# Altium PCB LM7X05-PCB.PcbDoc
Units mm, origin at the board's own origin, x right, y up, seen from the top; angles counter-clockwise.
Board outline 100 x 60 mm, 2 copper layers (Top Layer, Bottom Layer); 55 components, 9 nets, 135 pads, 128 vias.
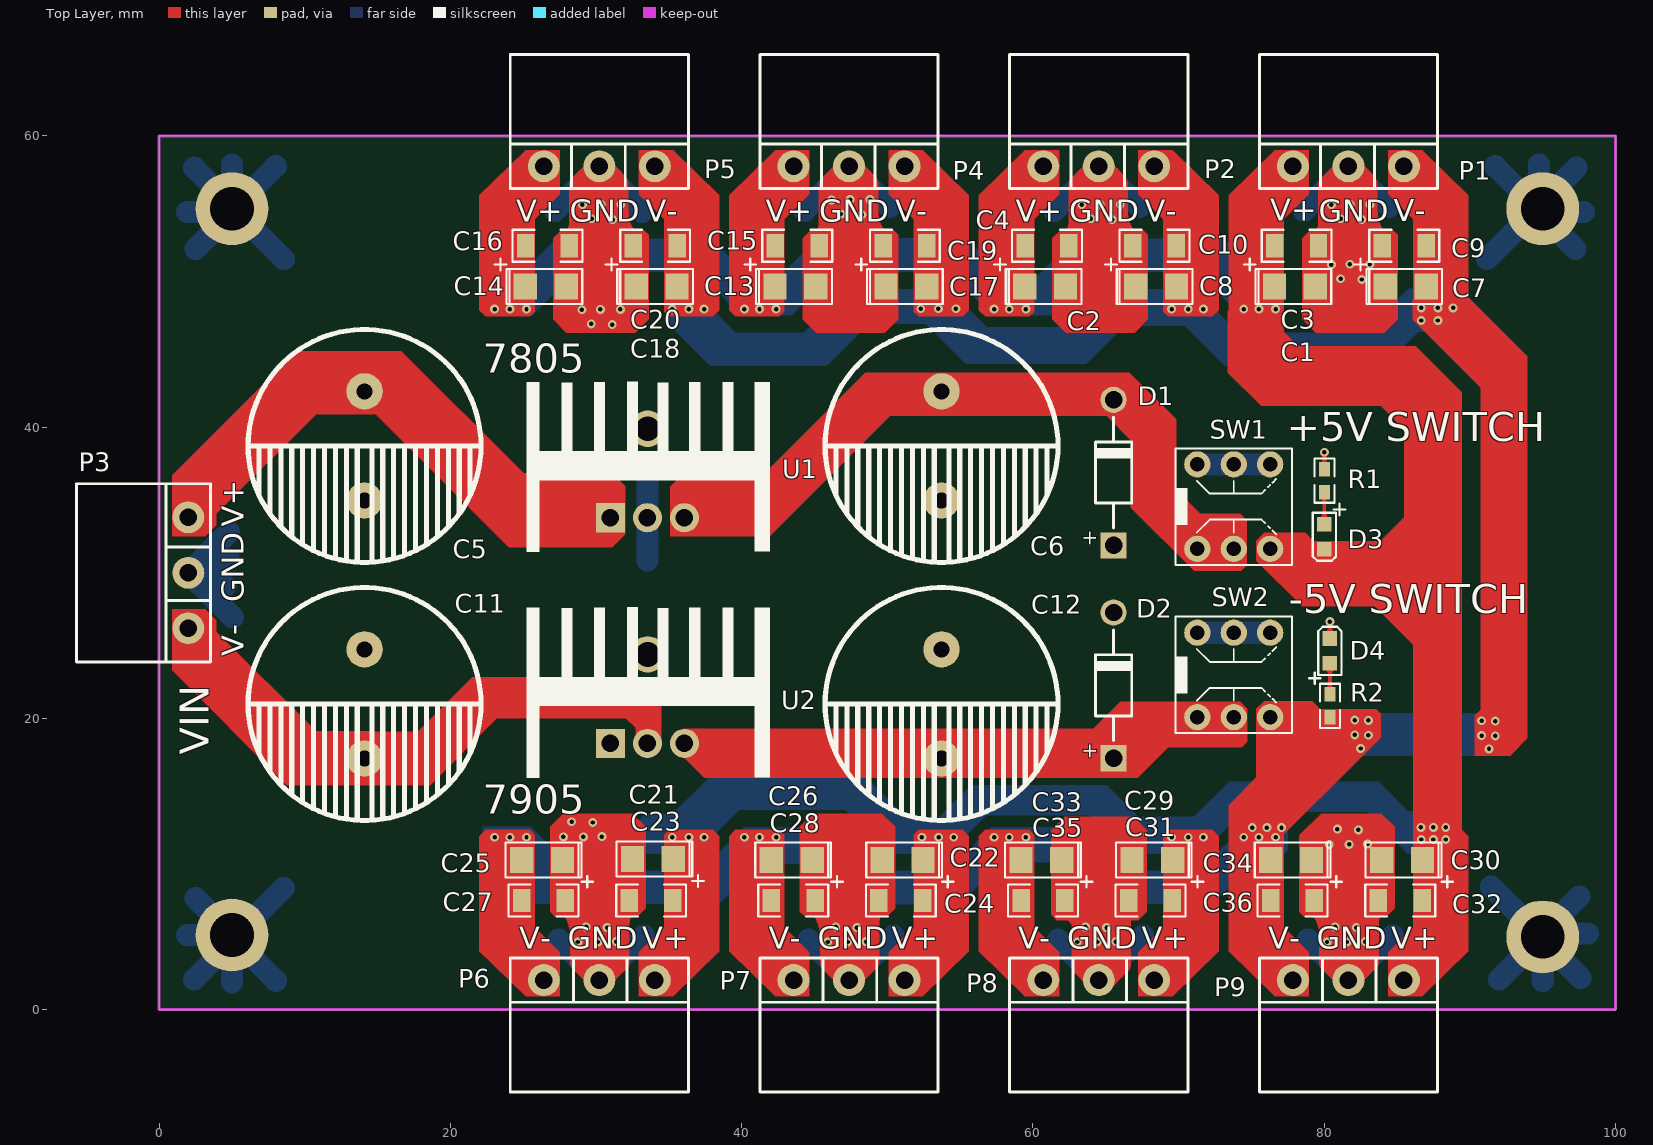
[diagram p0: Top Layer view]
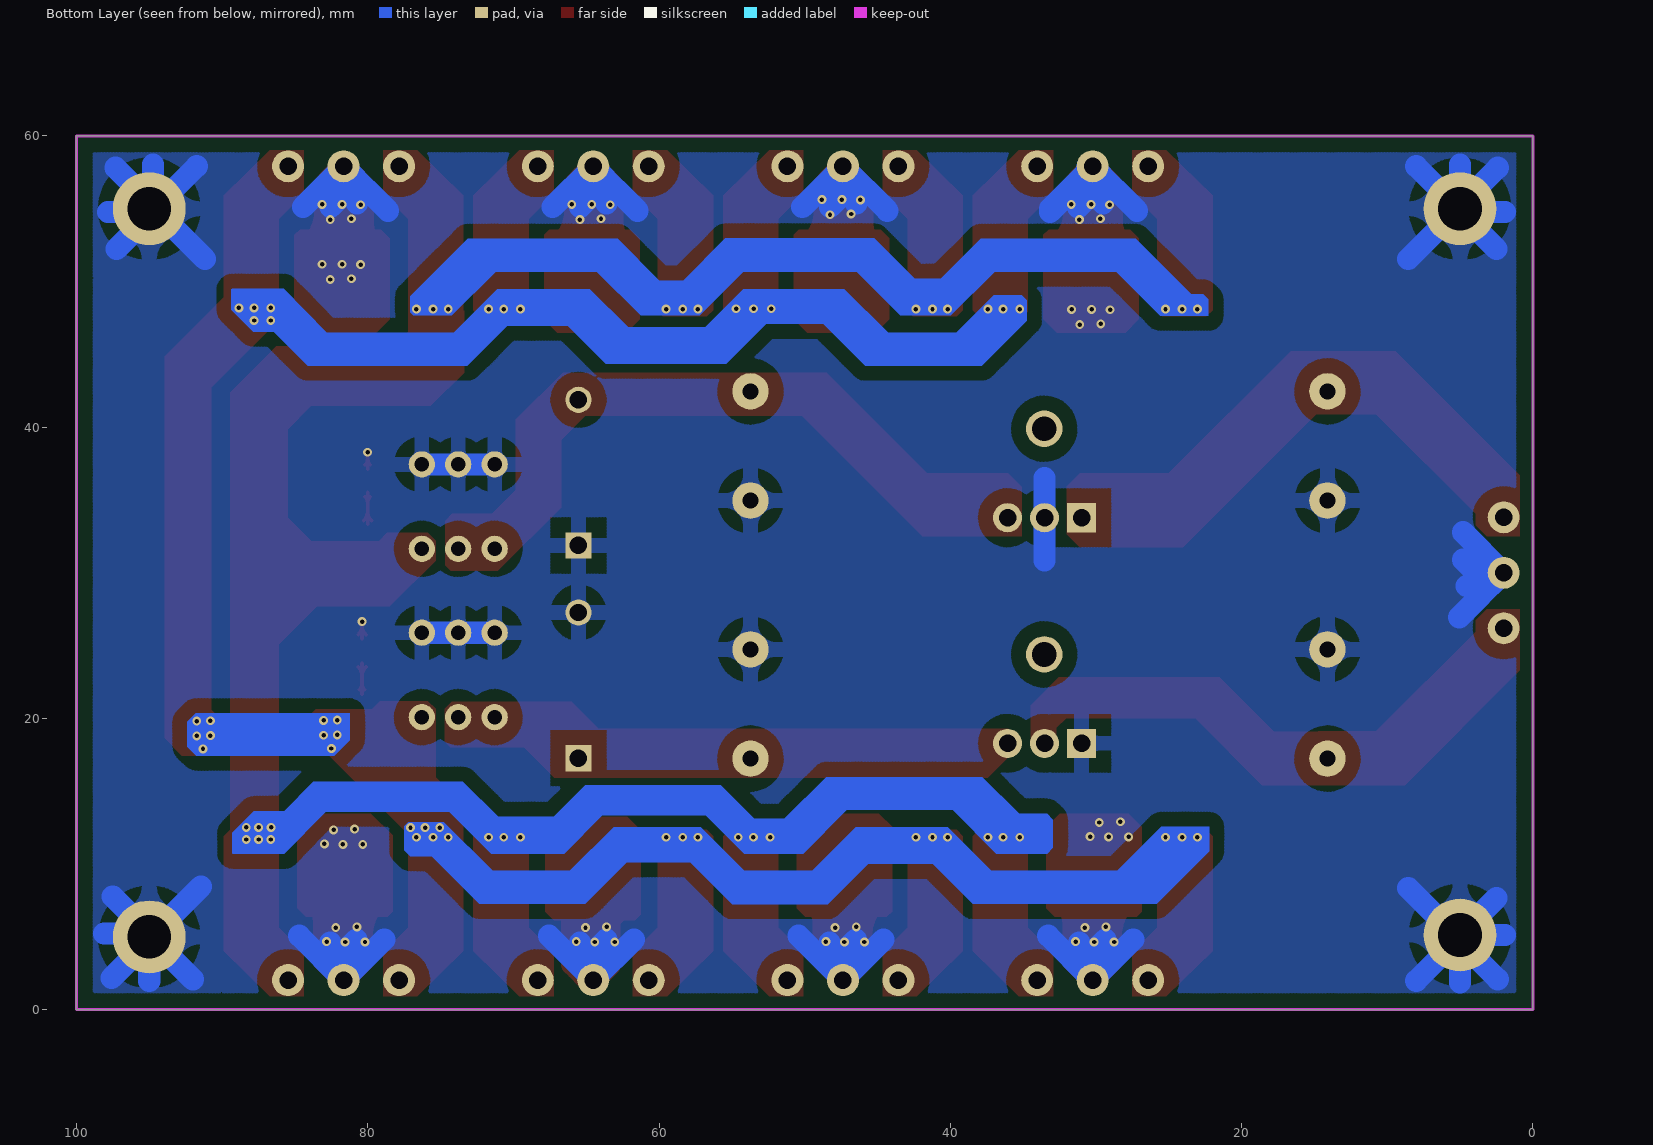
[diagram p1: Bottom Layer view, seen from below]

## Layer stack, top to bottom
Top Layer: signal copper 0.0356
Dielectric: dielectric 0.32, FR-4, Dk 4.8
Bottom Layer: signal copper 0.0356

## Board outline
0,0 100,0 100,60 0,60

## Design rules (kind name [scope] priority, off if disabled: settings)
Clearance Clearance_gnd [inpoly] p1: gap=1.016
Clearance [All] p2: gap=0.508
PolygonConnect PolygonConnect_1 [isvia] p1: connectstyle=Direct reliefconductorwidth=0.254 reliefentries=4 polygonreliefangle="90 Angle"
PolygonConnect [All] p2: connectstyle=Relief reliefconductorwidth=1.016 reliefentries=4 polygonreliefangle="90 Angle"
RoutingVias [All] p1: holewidth=0.762 width=1.27 viastyle="Through Hole" minholewidth=0.762 minwidth=1.27 maxholewidth=0.762 maxwidth=1.27
SilkscreenOverComponentPads [All] p1: minsilkscreentomaskgap=0.254
SolderMaskExpansion [All] p1: expansion=0.064
Width [All] p1: maxlimit=1.524 minlimit=0.254 preferedwidth=0.254
27 further rules are at their usual default settings.

## Classes and differential pairs
component class "Room Definition 1": C1 C3 C7 C9 P1
component class "Room Definition 2": C13 C15 C17 C19 P4
component class "Room Definition 3": C14 C16 C18 C20 P5
component class "Room Definition 4": C2 C4 C8 C10 P2
component class "Room Definition 5": C21 C23 C25 C27 P6
component class "Room Definition 6": C22 C24 C26 C28 P7
component class "Room Definition 7": C29 C31 C33 C35 P8
component class "Room Definition 8": C30 C32 C34 C36 P9

## Components (designator, comment, footprint, x,y, rotation, side; value= is the part's Value field where it differs from the comment)
C1 "10uF" 1206T 77.981,49.657 r0 top locked
C2 "10uF" 1206T 60.836,49.657 r0 top locked
C3 "0.1uF" 1206C 78.105,52.451 r180 top locked
C4 "0.1uF" 1206C 60.96,52.451 r180 top locked
C5 "2200uF/25V" C(16x31) 14.105,38.71 r270 top locked
C6 "2200uF/16V" C(16x31) 53.721,38.71 r270 top locked
C7 "10uF" 1206T 85.595,49.657 r0 top locked
C8 "10uF" 1206T 68.45,49.657 r0 top locked
C9 "0.1uF" 1206C 85.495,52.451 r180 top locked
C10 "0.1uF" 1206C 68.35,52.451 r180 top locked
C11 "2200uF/25V" C(16x31) 14.105,20.99 r270 top locked
C12 "2200uF/16V" C(16x31) 53.721,20.99 r270 top locked
C13 "10uF" 1206T 43.691,49.657 r0 top locked
C14 "10uF" 1206T 26.546,49.657 r0 top locked
C15 "0.1uF" 1206C 43.815,52.451 r180 top locked
C16 "0.1uF" 1206C 26.67,52.451 r180 top locked
C17 "10uF" 1206T 51.305,49.657 r0 top locked
C18 "10uF" 1206T 34.16,49.657 r0 top locked
C19 "0.1uF" 1206C 51.205,52.451 r180 top locked
C20 "0.1uF" 1206C 34.06,52.451 r180 top locked
C21 "10uF" 1206T 33.906,10.343 r180 top locked
C22 "10uF" 1206T 51.051,10.287 r180 top locked
C23 "0.1uF" 1206C 33.782,7.493 r0 top locked
C24 "0.1uF" 1206C 50.927,7.493 r0 top locked
C25 "10uF" 1206T 26.292,10.287 r180 top locked
C26 "10uF" 1206T 43.437,10.287 r180 top locked
C27 "0.1uF" 1206C 26.392,7.493 r0 top locked
C28 "0.1uF" 1206C 43.537,7.493 r0 top locked
C29 "10uF" 1206T 68.196,10.287 r180 top locked
C30 "10uF" 1206T 85.341,10.287 r180 top locked
C31 "0.1uF" 1206C 68.072,7.493 r0 top locked
C32 "0.1uF" 1206C 85.217,7.493 r0 top locked
C33 "10uF" 1206T 60.582,10.287 r180 top locked
C34 "10uF" 1206T 77.727,10.287 r180 top locked
C35 "0.1uF" 1206C 60.682,7.493 r0 top locked
C36 "0.1uF" 1206C 77.827,7.493 r0 top locked
D1 "1N4001" DIODE-10R0X2R5-1R2 65.532,36.877 r90 top locked
D2 "1N4001" DIODE-10R0X2R5-1R2 65.532,22.272 r90 top locked
D3 "LED" 0603D 80.01,32.473 r270 top locked
D4 "LED" 0603D 80.391,24.638 r90 top locked
P1 "Header 3" KF2EDG_3R81_3P 81.661,57.912 r0 top locked
P2 "Header 3" KF2EDG_3R81_3P 64.516,57.912 r0 top locked
P3 "Header 3" KF2EDG_3R81_3P 2,30 r90 top locked
P4 "Header 3" KF2EDG_3R81_3P 47.371,57.912 r0 top locked
P5 "Header 3" KF2EDG_3R81_3P 30.226,57.912 r0 top locked
P6 "Header 3" KF2EDG_3R81_3P 30.226,2.032 r180 top locked
P7 "Header 3" KF2EDG_3R81_3P 47.371,2.032 r180 top locked
P8 "Header 3" KF2EDG_3R81_3P 64.516,2.032 r180 top locked
P9 "Header 3" KF2EDG_3R81_3P 81.661,2.032 r180 top locked
R1 "5k1" R0603 80.01,36.322 r90 top locked
R2 "5k1" R0603 80.391,20.866 r270 top locked
SW1 "SWITCH" SW-8R5X8R5 73.787,34.544 r90 top locked
SW2 "SWITCH" SW-8R5X8R5 73.787,22.987 r90 top locked
U1 "LM7805" TO-220B 33.528,33.782 r0 top locked
U2 "LM7905" TO-220B 33.529,18.288 r0 top locked

## Footprints (in the part's own frame and the unit in brackets; to place one, negate y for a bottom-side part, rotate by r counter-clockwise, add the part's x,y. Pads: shape width x height; smd on the part's side, far side on the other; paste and mask are expansions set on the pad)
0603D [mm]
  rect 1x1 smd: 1(0.85,0) 2(-0.85,0)
  silkscreen extent -2.28,-0.8 1.65,1.44
1206C [mm]
  rect 1.2x1.6 smd: 1(-1.5,0) 2(1.5,0)
  silkscreen extent -2.4,-1.1 2.4,1.1
1206T [mm]
  rect 1.6x1.8 smd: 1(-1.4,0) 2(1.4,0)
  silkscreen extent -3.5,-1.2 2.5,1.9
C(16x31) [mm]
  round 2.5 hole 1.1: 1(-3.75,0) 2(3.75,0)
  silkscreen extent -8,-8 8,8, body extent -8,-7.99 7.99,7.99, height 31.01
DIODE-10R0X2R5-1R2 [mm]
  rect 1.8x1.8 hole 1.2: 1(-5,0)
  round 1.8 hole 1.2: 2(5,0)
  silkscreen extent -3.8,-1.25 3.8,1.25
KF2EDG_3R81_3P [mm]
  round 2.2 hole 1.2: 1(-3.81,0) 2(0,0) 3(3.81,0)
  silkscreen extent -6.11,-1.52 6.11,7.68
R0603 [mm] "Chip Resistor, 2-Leads, Body 1.6x0.8mm, IPC Medium Density"
  rect 1x0.762 smd: 1(-0.8,0) 2(0.8,0)
  silkscreen extent -1.52,-0.69 1.52,0.69, body extent -0.8,-0.4 0.8,0.4, height 0.38
SW-8R5X8R5 [mm]
  round 1.8 hole 1: 1(-2.9,2.5) 2(-2.9,0) 3(-2.9,-2.5) 4(2.9,-2.5) 5(2.9,0) 6(2.9,2.5)
  silkscreen extent -4,-4 4,4
TO-220B [mm]
  rect 2x2 hole 1.2: 1(-2.54,0)
  round 2 hole 1.2: 2(0,0) 3(2.54,0)
  round 2.5 hole 1.7: ""(0.024,6.108)
  silkscreen extent -8.31,-2.36 8.41,9.35

## Part data
C1 C2 C7 C8 C13 C14 C17 C18 C21 C22 C25 C26 C29 C30 C33 C34: library part Cap2, "CAP TANT 10UF 10V 10% 1206"
C3 C4 C9 C10 C15 C16 C19 C20 C23 C24 C27 C28 C31 C32 C35 C36: library part Cap1, "CAP CER 10000PF 100V X7R 0603"
C5 C6 C11 C12: library part Cap3, "CAP ALUM POLY 150UF 20% 10V SMD"
D1 D2: library part Diode, "Default Diode"
D3 D4: "Typical RED GaAs LED"
P1 P2 P3 P4 P5 P6 P7 P8 P9: "Header, 3-Pin"
R1 R2: library part Res1, "RES SMD 1K OHM 0.5% 1/16W 0603"
U1: library part LM78XX, "LM78XX"
U2: library part LM79XX, "LM79XX"

## Free pads (board coordinates)
  round 5 hole 3: 0(5,5.127) 0(5,55) 0(95,5) 0(95,55)

## Via types
v1: diameter 0.61, hole 0.305, Top Layer to Bottom Layer, tented both sides, 128 vias

## Nets (pads, with @x,y where several pads share a name; then routed paths per layer and width w, separated by ;. In a path a pad name is that pad's centre, name@x,y a point inside that pad or via, vN(x,y) a via of type N, cw(c..) or ccw(c..) an arc to the next point about the centre after c; other vN are vias at no path point)
+5V: C1.1 C2.1 C3.2 C4.2 C13.1 C14.1 C15.2 C16.2 C21.1 C22.1 C23.2 C24.2 C29.1 C30.1 C31.2 C32.2 D3.1 P1.1 P2.1 P4.1 P5.1 P6.1 P7.1 P8.1 P9.1 SW1.3 | length 10.5
  Top Layer w0.254: SW1.3 D3.1@79.989,31.644 ; SW1.3@76.654,31.277 cw(c77.54,30.391) 77.54,31.644 cw(c77.54,32.897) SW1.3@76.654,32.011 ; SW1.3@76.834,31.097 cw(c78.153,29.778) 78.153,31.644 cw(c78.153,33.51) SW1.3@76.834,32.191 ; 79.059,31.644 cw(c79.059,30.672) D3.1@79.746,31.359 ; 79.16,31.644 ccw(c79.16,32.473) D3.1@79.746,31.887 ; D3.1 D3.1@79.989,31.644 ; D3.1@80.391,31.623 80.37,31.644 80.01,31.644 D3.1@79.989,31.644
  other v1: 86.665,11.684 87.49,11.684 88.341,11.684 35.23,11.836 36.373,11.836 37.414,11.836 52.375,11.836 53.518,11.836 54.559,11.836 69.52,11.836 70.663,11.836 71.704,11.836 86.639,12.522 87.49,12.522 88.341,12.522 23.038,48.108 24.079,48.108 25.222,48.108 40.183,48.108 41.224,48.108 42.367,48.108 57.328,48.108 58.369,48.108 59.512,48.108 74.473,48.108 75.514,48.108 76.657,48.108
+5V_IN: C6.1 D1.2 SW1.1 SW1.2 U1.3 | length 103.8
  Top Layer w0.254: U1.3 41.351,33.782 50.029,42.46 C6.1 64.949,42.46 D1.2 68.555,38.854 68.555,34.376 SW1.1 SW1.2 ; U1.3@36.506,33.344 cw(c37.562,32.288) 37.562,33.782 cw(c37.562,35.276) U1.3@36.506,34.22 ; U1.3@36.685,33.165 cw(c38.176,31.674) 38.176,33.782 cw(c38.176,35.89) U1.3@36.685,34.399 ; C6.1@52.927,41.666 ccw(c51.01,39.748) 51.01,42.46 ccw(c51.01,45.171) C6.1@52.927,43.254 ; C6.1@53.107,41.845 ccw(c51.623,40.362) 51.623,42.46 ccw(c51.623,44.558) C6.1@53.107,43.074 ; C6.1@53.286,42.025 ccw(c52.236,40.975) 52.236,42.46 ccw(c52.236,43.944) C6.1@53.286,42.894 ; C6.1@54.156,42.025 cw(c55.206,40.975) 55.206,42.46 cw(c55.206,43.944) C6.1@54.156,42.894 ; C6.1@54.335,41.845 cw(c55.819,40.362) 55.819,42.46 cw(c55.819,44.558) C6.1@54.335,43.074 ; C6.1@54.515,41.666 cw(c56.432,39.748) 56.432,42.46 cw(c56.432,45.171) C6.1@54.515,43.254 ; 62.259,42.46 cw(c62.259,38.604) D1.2@64.985,41.33 ; 62.873,42.46 cw(c62.873,39.218) D1.2@65.165,41.51 ; 63.486,42.46 cw(c63.486,39.831) D1.2@65.345,41.69 ; 64.099,42.46 cw(c64.099,40.444) D1.2@65.524,41.869 ; 64.712,42.46 cw(c64.712,41.057) D1.2@65.704,42.049 ; D1.2@65.532,41.104 cw(c65.532,39.238) 66.852,40.557 cw(c68.171,41.877) D1.2@66.305,41.877 ; D1.2@65.532,41.358 cw(c65.532,40.105) 66.418,40.991 cw(c67.304,41.877) D1.2@66.051,41.877 ; SW1.1@70.514,31.644 ccw(c68.648,31.644) 69.967,32.964 ccw(c71.287,34.283) SW1.1@71.287,32.417 ; SW1.1@70.768,31.644 ccw(c69.515,31.644) 70.401,32.53 ccw(c71.287,33.416) SW1.1@71.287,32.163 ; SW1.1@71.654,31.277 cw(c72.54,30.391) 72.54,31.644 cw(c72.54,32.897) SW1.1@71.654,32.011 ; SW1.1@71.834,31.097 cw(c73.153,29.778) 73.153,31.644 cw(c73.153,33.51) SW1.1@71.834,32.191 ; SW1.2@73.24,31.097 ccw(c71.921,29.778) 71.921,31.644 ccw(c71.921,33.51) SW1.2@73.24,32.191 ; SW1.2@73.42,31.277 ccw(c72.534,30.391) 72.534,31.644 ccw(c72.534,32.897) SW1.2@73.42,32.011
+12V: C5.1 P3.3 U1.1
-5V: C7.2 C8.2 C9.1 C10.1 C17.2 C18.2 C19.1 C20.1 C25.2 C26.2 C27.1 C28.1 C33.2 C34.2 C35.1 C36.1 P1.3 P2.3 P4.3 P5.3 P6.3 P7.3 P8.3 P9.3 R2.2 SW2.3 | length 10
  Top Layer w0.254: SW2.3 80.37,20.087 R2.2 ; SW2.3@76.654,19.72 cw(c77.54,18.834) 77.54,20.087 cw(c77.54,21.34) SW2.3@76.654,20.454 ; SW2.3@76.834,19.54 cw(c78.153,18.221) 78.153,20.087 cw(c78.153,21.953) SW2.3@76.834,20.634 ; 79.727,20.087 cw(c79.727,19.402) R2.2@80.211,19.886 ; 79.828,20.087 ccw(c79.828,20.629) R2.2@80.211,20.246
  other v1: 23.038,11.836 24.079,11.836 25.222,11.836 40.183,11.836 41.224,11.836 42.367,11.836 57.328,11.836 58.369,11.836 59.512,11.836 74.473,11.836 75.514,11.836 76.657,11.836 75.057,12.497 76.06,12.497 77.064,12.497 91.313,17.907 82.499,17.932 91.745,18.796 90.805,18.821 83.033,18.847 82.093,18.872 91.745,19.812 90.805,19.837 83.033,19.863 82.093,19.888 86.665,47.32 87.808,47.32 35.23,48.108 36.373,48.108 37.414,48.108 69.52,48.108 70.663,48.108 71.704,48.108 52.299,48.133 53.505,48.133 54.712,48.133 86.665,48.184 87.808,48.184 88.849,48.184
-5V_IN: C12.2 D2.1 SW2.1 SW2.2 U2.3 | length 77
  Top Layer w0.254: U2.3 45.771,18.288 46.819,17.24 C12.2 65.5,17.24 D2.1 68.347,20.087 SW2.1 ; U2.3@36.506,17.85 cw(c37.563,16.793) 37.563,18.288 cw(c37.563,19.782) U2.3@36.506,18.726 ; U2.3@36.686,17.67 cw(c38.176,16.18) 38.176,18.288 cw(c38.176,20.395) U2.3@36.686,18.905 ; C12.2@52.927,16.446 ccw(c51.01,14.528) 51.01,17.24 ccw(c51.01,19.951) C12.2@52.927,18.034 ; C12.2@53.107,16.625 ccw(c51.623,15.142) 51.623,17.24 ccw(c51.623,19.338) C12.2@53.107,17.854 ; C12.2@53.286,16.805 ccw(c52.236,15.755) 52.236,17.24 ccw(c52.236,18.724) C12.2@53.286,17.674 ; C12.2@54.156,16.805 cw(c55.206,15.755) 55.206,17.24 cw(c55.206,18.724) C12.2@54.156,17.674 ; C12.2@54.335,16.625 cw(c55.819,15.142) 55.819,17.24 cw(c55.819,19.338) C12.2@54.335,17.854 ; C12.2@54.515,16.446 cw(c56.432,14.528) 56.432,17.24 cw(c56.432,19.951) C12.2@54.515,18.034 ; 63.588,17.24 ccw(c63.588,19.216) D2.1@64.985,17.819 ; 63.744,17.24 cw(c63.744,15.484) D2.1@64.985,16.725 ; 64.201,17.24 ccw(c64.201,18.603) D2.1@65.165,17.639 ; 64.357,17.24 cw(c64.357,16.097) D2.1@65.165,16.905 ; D2.1@65.532,17.791 ccw(c65.532,19.044) 66.418,18.158 ccw(c67.304,17.272) D2.1@66.051,17.272 ; D2.1@65.532,18.045 ccw(c65.532,19.911) 66.852,18.592 ccw(c68.171,17.272) D2.1@66.305,17.272 ; SW2.1@70.74,19.54 ccw(c69.421,18.221) 69.421,20.087 ccw(c69.421,21.953) SW2.1@70.74,20.634 ; SW2.1@70.92,19.72 ccw(c70.034,18.834) 70.034,20.087 ccw(c70.034,21.34) SW2.1@70.92,20.454
-12V: C11.2 P3.1 U2.2 | length 39.8
  Top Layer w0.254: C11.2 17.976,17.24 22.682,21.946 32.156,21.946 33.529,20.573 U2.2 ; C11.2@14.54,16.805 cw(c15.59,15.755) 15.59,17.24 cw(c15.59,18.724) C11.2@14.54,17.674 ; C11.2@14.719,16.625 cw(c16.203,15.142) 16.203,17.24 cw(c16.203,19.338) C11.2@14.719,17.854 ; C11.2@14.899,16.446 cw(c16.816,14.528) 16.816,17.24 cw(c16.816,19.951) C11.2@14.899,18.034 ; U2.2@32.911,18.905 ccw(c31.421,20.396) 33.529,20.396 ccw(c35.636,20.396) U2.2@34.146,18.905 ; U2.2@33.091,18.726 ccw(c32.034,19.782) 33.529,19.782 ccw(c35.023,19.782) U2.2@33.966,18.726
GND: C1.2 C2.2 C3.1 C4.1 C5.2 C6.2 C7.1 C8.1 C9.2 C10.2 C11.1 C12.1 C13.2 C14.2 C15.1 C16.1 C17.1 C18.1 C19.2 C20.2 C21.2 C22.2 C23.1 C24.1 C25.1 C26.1 C27.2 C28.2 C29.2 C30.2 C31.1 C32.1 C33.1 C34.1 C35.2 C36.2 D1.1 D2.2 D4.1 P1.2 P2.2 P3.2 P4.2 P5.2 P6.2 P7.2 P8.2 P9.2 pad.0 R1.2 SW1.4 SW1.5 SW1.6 SW2.4 SW2.5 SW2.6 U1.2 U2.1 | length 478.2
  Top Layer w0.254: R1.2@79.83,37.421 ccw(c79.397,37.854) 80.01,37.854 ; v1@79.884,38.153 cw(c79.581,37.849) 80.01,37.849 cw(c80.439,37.849) v1@80.136,38.153 ; R1.2 v1(80.01,38.279) ; 80.01,37.854 ccw(c80.623,37.854) R1.2@80.19,37.421 ; D4.1@80.127,25.752 ccw(c79.491,26.388) 80.391,26.388 ccw(c81.291,26.388) D4.1@80.655,25.752 ; v1@80.265,26.519 cw(c79.962,26.215) 80.391,26.215 cw(c80.82,26.215) v1@80.517,26.519 ; D4.1 v1(80.391,26.645)
  Top Layer w1.524: C27.2 28.981,6.404 28.981,3.277 P6.2 ; C27.2@27.956,7.442 cw(c27.289,5.887) 28.981,5.887 ; C27.2@28.007,7.408 cw(c25.653,5.054) 28.981,5.054 ; C16.1@28.285,52.536 ccw(c26.786,54.035) 28.905,54.035 ; 28.905,52.629 28.905,56.591 P5.2 ; 28.981,5.853 ccw(c34.047,5.853) P6.2@30.465,2.271 ; P5.2@29.987,57.673 cw(c26.405,54.091) 31.471,54.091 ; P5.2@30.19,57.576 cw(c30.039,56.152) 31.471,56.152 ; 30.226,7.01 P6.2 ; 30.226,52.934 P5.2 ; 31.471,54.89 ccw(c34.799,54.89) C20.2@32.445,52.536 ; 31.547,5.909 cw(c33.666,5.909) C23.1@32.167,7.408 ; 31.547,6.557 cw(c32.467,6.557) C23.1@32.242,7.45 ; 31.547,7.315 31.547,3.353 P6.2 ; C20.2 31.471,53.54 31.471,56.667 P5.2 ; C28.2 46.126,6.404 46.126,3.277 P7.2 ; C28.2@45.101,7.442 cw(c44.434,5.887) 46.126,5.887 ; C28.2@45.152,7.408 cw(c42.798,5.054) 46.126,5.054 ; C15.1@45.43,52.536 ccw(c43.931,54.035) 46.05,54.035 ; 46.05,52.629 46.05,56.591 P4.2 ; 46.126,5.853 ccw(c51.192,5.853) P7.2@47.61,2.271 ; P4.2@47.132,57.673 cw(c43.55,54.091) 48.616,54.091 ; P4.2@47.335,57.576 cw(c47.184,56.152) 48.616,56.152 ; 47.371,7.01 P7.2 ; 47.371,52.934 P4.2 ; 48.616,54.89 ccw(c51.944,54.89) C19.2@49.59,52.536 ; 48.692,5.909 cw(c50.811,5.909) C24.1@49.312,7.408 ; 48.692,6.557 cw(c49.612,6.557) C24.1@49.387,7.45 ; 48.692,7.315 48.692,3.353 P7.2 ; C19.2 48.616,53.54 48.616,56.667 P4.2 ; C35.2@62.309,7.264 63.398,6.175 63.398,3.048 P8.2@64.643,1.803 ; C4.1@62.575,52.536 ccw(c61.076,54.035) 63.195,54.035 ; 63.195,52.629 63.195,56.591 P2.2 ; v1@63.398,5.546 ccw(c68.03,5.546) P8.2@64.755,2.271 ; P8.2@64.277,2.271 ccw(c63.393,3.155) 64.643,3.155 ; P2.2@64.277,57.673 cw(c60.695,54.091) 65.761,54.091 ; P2.2@64.48,57.576 cw(c64.329,56.152) 65.761,56.152 ; P8.2@64.516,2.37 ccw(c64.516,4.045) 65.7,2.86 ; 64.516,52.934 P2.2 ; 64.643,6.782 P8.2@64.643,1.803 ; 65.761,54.89 ccw(c69.089,54.89) C10.2@66.735,52.536 ; 65.964,6.216 cw(c67.649,6.216) C31.1@66.457,7.408 ; 65.964,6.651 cw(c66.811,6.651) C31.1@66.515,7.445 ; 65.964,7.087 65.964,3.124 P8.2@64.643,1.803 ; C10.2 65.761,53.54 65.761,56.667 P2.2 ; C36.2 80.416,6.404 80.416,3.277 P9.2 ; C36.2@79.391,7.442 cw(c78.724,5.887) 80.416,5.887 ; C36.2@79.442,7.408 cw(c77.088,5.054) 80.416,5.054 ; C3.1@79.72,52.536 ccw(c78.221,54.035) 80.34,54.035 ; 80.34,52.629 80.34,56.591 P1.2 ; 80.416,5.853 ccw(c85.482,5.853) P9.2@81.9,2.271 ; P1.2@81.422,57.673 cw(c77.84,54.091) 82.906,54.091 ; P1.2@81.625,57.576 cw(c81.474,56.152) 82.906,56.152 ; 81.661,7.01 P9.2 ; 81.661,52.934 P1.2 ; 82.906,54.89 ccw(c86.234,54.89) C9.2@83.88,52.536 ; 82.982,5.909 cw(c85.101,5.909) C32.1@83.602,7.408 ; 82.982,6.557 cw(c83.902,6.557) C32.1@83.677,7.45 ; 82.982,7.315 82.982,3.353 P9.2 ; C9.2 82.906,53.54 82.906,56.667 P1.2
  Bottom Layer w0.254: 28.473,55.728 28.473,56.693
  Bottom Layer w1.524: 1.905,5.131 1.909,5.127 pad.0@5,5.127 ; 1.905,54.771 1.909,54.775 pad.0@5,54.775 ; 2.413,2.088 5,4.675 pad.0@5,5.127 ; 2.413,57.814 5,55.227 pad.0@5,54.775 ; 2.487,7.676 5,5.163 pad.0@5,5.127 ; 2.487,52.226 5,54.739 pad.0@5,54.775 ; 4.565,29.086 2.914,29.086 P3.2 ; 4.789,30.889 3.9,30 P3.2 ; 4.789,32.789 P3.2 ; 5,1.876 pad.0@5,5.127 ; pad.0@5,4.441 pad.0@5,5.127 ; pad.0@5,55.461 pad.0@5,54.775 ; 5,58.026 pad.0@5,54.775 ; 5.048,26.952 P3.2 ; 8.001,1.986 5,4.987 pad.0@5,5.127 ; 8.001,57.916 5,54.915 pad.0@5,54.775 ; 8.56,8.357 5.33,5.127 pad.0@5,5.127 ; 8.56,51.546 5.33,54.775 pad.0@5,54.775 ; 27.178,54.864 P5.2 ; 27.437,4.821 P6.2 ; 29.337,4.821 30.226,3.932 P6.2 ; 29.515,55.379 cw(c32.759,55.379) P5.2@30.465,57.673 ; 29.515,55.428 29.515,57.201 P5.2 ; P5.2@30.564,57.912 ccw(c31.932,57.912) 30.965,56.945 ; v1@31.14,4.597 31.14,2.946 P6.2 ; 31.217,55.093 30.226,56.083 P5.2 ; 33.274,5.08 P6.2 ; 33.528,30.841 U1.2 33.528,36.505 ; 44.323,54.864 P4.2 ; 44.582,4.821 P7.2 ; 46.457,55.347 46.457,56.998 P4.2 ; 46.482,4.821 47.371,3.932 P7.2 ; 48.26,55.123 47.371,56.012 P4.2 ; v1@48.285,4.597 48.285,2.946 P7.2 ; 50.16,55.123 P4.2 ; 50.419,5.08 P7.2 ; 61.468,54.864 P2.2 ; 61.727,4.821 P8.2 ; v1@63.602,55.347 63.602,56.998 P2.2 ; 63.627,4.821 64.516,3.932 P8.2 ; 65.405,55.123 64.516,56.012 P2.2 ; v1@65.43,4.597 65.43,2.946 P8.2 ; 67.305,55.123 P2.2 ; 67.564,5.08 P8.2 ; SW2.6 SW2.4 ; SW1.6 SW1.4 ; 78.613,54.864 P1.2 ; 78.872,4.821 P9.2 ; v1@80.747,55.347 80.747,56.998 P1.2 ; 80.772,4.821 81.661,3.932 P9.2 ; 82.55,55.123 81.661,56.012 P1.2 ; v1@82.575,4.597 82.575,2.946 P9.2 ; 84.45,55.123 P1.2 ; 84.709,5.08 P9.2 ; 91.182,51.546 94.412,54.775 pad.0@94.742,54.775 ; 91.44,8.454 94.67,5.225 pad.0@95,5.225 ; 91.741,57.916 94.742,54.915 pad.0@94.742,54.775 ; 91.999,2.084 95,5.085 pad.0@95,5.225 ; pad.0@94.742,55.461 pad.0@94.742,54.775 ; 94.742,58.026 pad.0@94.742,54.775 ; 95,1.974 pad.0@95,5.225 ; pad.0@95,4.539 pad.0@95,5.225 ; 97.255,52.226 94.742,54.739 pad.0@94.742,54.775 ; 97.329,57.814 94.742,55.227 pad.0@94.742,54.775 ; 97.513,7.774 95,5.261 pad.0@95,5.225 ; 97.587,2.186 95,4.773 pad.0@95,5.225 ; 97.833,54.775 pad.0@94.742,54.775 ; 98.095,5.229 98.091,5.225 pad.0@95,5.225 ; P5.2 30.226,57.683 33.147,54.762 33.147,54.991 P5.2
  other v1: 28.753,4.648 30.124,4.648 45.898,4.648 47.269,4.648 63.043,4.648 64.414,4.648 80.188,4.648 81.559,4.648 31.394,4.674 48.539,4.674 65.684,4.674 82.829,4.674 30.759,5.639 47.904,5.639 65.049,5.639 82.194,5.639 29.312,5.69 46.457,5.69 63.602,5.69 80.747,5.69 80.34,11.354 81.712,11.354 82.982,11.379 27.762,11.862 29.134,11.862 30.404,11.887 82.347,12.344 80.899,12.395 29.769,12.852 28.321,12.903 31.115,47.041 29.667,47.092 29.032,48.057 30.302,48.082 31.674,48.082 82.575,50.14 81.128,50.19 80.493,51.156 81.763,51.181 83.134,51.181 31.14,54.254 65.43,54.254 82.575,54.254 29.693,54.305 63.983,54.305 81.128,54.305 48.26,54.585 46.812,54.635 29.058,55.27 63.348,55.27 80.493,55.27 30.328,55.296 31.699,55.296 64.618,55.296 65.989,55.296 81.763,55.296 83.134,55.296 46.177,55.601 47.447,55.626 48.819,55.626
NetD3_2: D3.2 R1.1 | length 4.6
  Top Layer w0.254: D3.2@79.746,33.587 ccw(c79.11,34.224) 80.01,34.224 ccw(c80.91,34.224) D3.2@80.274,33.587 ; R1.1@79.83,35.223 cw(c79.397,34.79) 80.01,34.79 cw(c80.623,34.79) R1.1@80.19,35.223 ; D3.2 R1.1
NetD4_2: D4.2 R2.1 | length 4.5
  Top Layer w0.254: D4.2@80.127,23.524 cw(c79.491,22.888) 80.391,22.888 cw(c81.291,22.888) D4.2@80.655,23.524 ; R2.1@80.211,21.965 ccw(c79.778,22.398) 80.391,22.398 ccw(c81.004,22.398) R2.1@80.571,21.965 ; R2.1 D4.2
pads on no net: U1. U2.

## Polygon pours and split planes (outlines as drawn)
GND on Bottom Layer "gnd" (hatched 90Degree grid 0.102 track 0.127, remove dead copper, pour order 1000): 0,0 100,0 100,60 0,60

## Keep-outs
Keep-Out Layer:
  the board outline again, w0.2

## Other copper
Top Layer:
  region net +12V: 0.889,36.703 9.398,45.212 14.859,45.212 15.367,44.704 15.367,41.402 14.859,40.894 10.795,40.894 3.937,34.036 3.937,33.274 3.175,32.512 0.889,32.512
  region net -12V: 0.889,23.297 8.763,15.423 14.605,15.423 15.367,16.185 15.367,18.471 14.732,19.106 10.795,19.106 3.937,25.964 3.937,26.726 3.175,27.488 0.889,27.488
  region net +12V: 14.859,40.894 24.003,31.75 31.115,31.75 32.004,32.639 32.004,35.941 31.115,36.83 25.019,36.83 16.637,45.212 14.859,45.212
  region net -12V: 14.224,19.101 17.785,19.106 21.514,22.835 32.563,22.835 34.493,20.904 34.493,18.186 34.061,17.755 33.02,17.755 32.715,18.059 32.715,19.355 32.055,20.015 23.19,20.015 18.598,15.423 14.605,15.423 14.224,15.804
  region net -5V_IN: 36.017,19.304 64.135,19.304 65.989,21.158 71.882,21.158 72.415,20.625 72.415,18.72 71.73,18.034 69.291,18.034 67.183,15.926 37.44,15.926 36.017,17.348
  region net -5V_IN: 71.882,21.158 74.219,21.158 74.701,20.676 74.701,18.39 74.346,18.034 71.73,18.034 71.287,18.477 71.287,20.087
  region net +5V_IN: 35.103,35.916 36.017,36.83 41.58,36.83 48.489,43.739 66.624,43.739 69.825,40.538 69.825,35.712 71.501,34.036 74.219,34.036 74.676,33.579 74.676,30.505 74.295,30.124 71.069,30.124 66.726,34.468 66.726,39.116 65.049,40.792 50.216,40.792 41.935,32.512 35.103,32.512
  region net -5V: 27.508,0.94 27.508,3.937 25.781,5.664 25.781,12.014 25.451,12.344 22.428,12.344 21.996,11.913 21.996,4.024 25.157,0.94
  region net -5V: 44.653,0.94 44.653,3.937 42.926,5.664 42.926,12.014 42.596,12.344 39.573,12.344 39.141,11.913 39.141,4.024 42.302,0.94
  region net -5V: 61.798,0.94 61.798,3.937 60.071,5.664 60.071,12.014 59.741,12.344 56.718,12.344 56.286,11.913 56.286,4.024 59.447,0.94
  region net -5V: 78.943,0.94 78.943,3.937 77.216,5.664 77.216,12.014 76.886,12.344 73.863,12.344 73.431,11.913 73.431,4.024 76.592,0.94
  region net +5V: 78.943,59.004 78.943,56.007 77.216,54.28 77.216,47.93 76.886,47.6 73.863,47.6 73.431,48.031 73.431,55.92 76.592,59.004
  region net +5V: 61.798,59.004 61.798,56.007 60.071,54.28 60.071,47.93 59.741,47.6 56.718,47.6 56.286,48.031 56.286,55.92 59.447,59.004
  region net +5V: 44.653,59.004 44.653,56.007 42.926,54.28 42.926,47.93 42.596,47.6 39.573,47.6 39.141,48.031 39.141,55.92 42.302,59.004
  region net +5V: 27.508,59.004 27.508,56.007 25.781,54.28 25.781,47.93 25.451,47.6 22.428,47.6 21.996,48.031 21.996,55.92 25.157,59.004
  region net -5V: 32.944,59.004 32.944,56.007 34.671,54.28 34.671,47.93 35.001,47.6 38.024,47.6 38.456,48.031 38.456,55.92 35.295,59.004
  region net -5V: 67.234,59.004 67.234,56.007 68.961,54.28 68.961,47.93 69.291,47.6 72.314,47.6 72.746,48.031 72.746,55.92 69.585,59.004
  region net -5V: 84.379,59.004 84.379,56.007 86.106,54.28 86.106,47.93 86.436,47.6 89.459,47.6 89.891,48.031 89.891,55.92 86.73,59.004
  region net +5V: 84.379,0.94 84.379,3.937 86.106,5.664 86.106,12.014 86.436,12.344 89.459,12.344 89.891,11.913 89.891,4.024 86.73,0.94
  region net +5V: 67.234,0.94 67.234,3.937 68.961,5.664 68.961,12.014 69.291,12.344 72.314,12.344 72.746,11.913 72.746,4.024 69.585,0.94
  region net +5V: 50.089,0.94 50.089,3.937 51.816,5.664 51.816,12.014 52.146,12.344 55.169,12.344 55.601,11.913 55.601,4.024 52.44,0.94
  region net +5V: 32.944,0.94 32.944,3.937 34.671,5.664 34.671,12.014 35.001,12.344 38.024,12.344 38.456,11.913 38.456,4.024 35.295,0.94
  region net -5V: 75.336,20.65 75.87,21.184 79.172,21.184 79.731,20.625 83.566,20.625 83.871,20.32 83.871,18.669 81.331,16.129 76.098,16.129 75.336,16.891
  region net +5V: 75.336,32.207 75.87,32.741 78.689,32.741 79.248,32.182 83.566,32.182 83.871,31.877 83.871,27.686 78.486,27.686 75.336,30.836
  region net -5V: 50.089,59.004 50.089,56.007 51.816,54.28 51.816,47.93 52.146,47.6 55.169,47.6 55.601,48.031 55.601,55.92 52.44,59.004
  region net -5V: 73.431,14.046 75.336,15.951 75.336,17.094 82.296,17.094 77.064,11.862 73.431,11.862
  region net +5V: 86.106,12.014 86.106,25.044 83.464,27.686 83.464,32.08 83.566,32.182 86.335,32.182 89.459,29.058 89.433,12.04
  region net +5V: 83.718,32.029 85.496,33.807 85.496,39.827 83.871,41.453 75.667,41.453 73.381,43.739 73.381,47.981 73.431,48.031 73.431,48.819 73.914,49.301 76.429,49.301 77.216,48.514 77.216,46.533 78.181,45.568 86.284,45.568 89.459,42.393 89.459,28.626 84.353,28.626 83.744,29.235
  region net -5V: 90.322,17.45 90.322,20.168 90.754,20.599 90.754,42.697 86.081,47.371 86.081,48.819 89.789,48.819 89.891,48.92 93.955,44.856 93.955,18.644 92.761,17.45
  region net GND: 26.848,6.731 26.848,12.548 27.762,13.462 32.487,13.462 33.401,12.548 33.401,6.96 32.817,6.375 27.203,6.375
  region net GND: 43.993,6.731 43.993,12.548 44.907,13.462 49.632,13.462 50.546,12.548 50.546,6.96 49.962,6.375 44.348,6.375
  region net GND: 61.265,6.502 61.265,12.319 62.179,13.233 66.904,13.233 67.818,12.319 67.818,6.731 67.234,6.147 61.62,6.147
  region net GND: 78.283,6.731 78.283,11.963 79.781,13.462 83.922,13.462 84.836,12.548 84.836,6.96 84.252,6.375 78.638,6.375
  region net GND: 85.039,53.213 85.039,47.396 84.125,46.482 79.4,46.482 78.486,47.396 78.486,52.984 79.07,53.569 84.684,53.569
  region net GND: 67.894,53.213 67.894,47.396 66.98,46.482 62.255,46.482 61.341,47.396 61.341,52.984 61.925,53.569 67.539,53.569
  region net GND: 50.749,53.213 50.749,47.396 49.835,46.482 45.11,46.482 44.196,47.396 44.196,52.984 44.78,53.569 50.394,53.569
  region net GND: 33.604,53.213 33.604,47.396 32.69,46.482 27.965,46.482 27.051,47.396 27.051,52.984 27.635,53.569 33.249,53.569
Bottom Layer:
  region net -5V: 22.225,12.548 25.527,12.548 28.55,9.525 37.186,9.525 40.183,12.522 46.482,12.522 49.479,9.525 54.153,9.525 57.15,12.522 63.119,12.522 66.116,9.525 71.425,9.525 74.778,12.878 77.216,12.878 77.495,12.598 77.495,10.947 77.089,10.541 75.616,10.541 72.339,7.264 65.075,7.264 62.205,10.135 57.861,10.135 54.966,7.239 48.412,7.239 45.644,10.008 41.199,10.008 38.456,7.264 25.832,7.264 22.225,10.871
  region net +5V: 89.306,10.744 85.725,10.693 82.884,13.589 74.403,13.589 71.532,10.719 66.523,10.719 63.906,13.335 56.775,13.335 54.159,10.719 50.095,10.719 47.098,13.716 39.827,13.716 36.83,10.719 33.356,10.719 32.95,11.125 32.95,13.056 33.356,13.462 35.281,13.462 37.795,15.977 48.52,15.977 51.39,13.106 53.448,13.106 55.759,15.418 65.049,15.418 67.234,13.233 71.05,13.233 73.463,15.646 83.744,15.646 85.75,13.64 87.814,13.64 89.306,12.147
  region net +5V: 85.725,10.693 89.256,10.693 89.306,10.744 89.306,11.1 89.103,11.303 86.03,11.303 85.725,10.998
  region net -5V: 85.775,49.504 89.306,49.504 89.357,49.454 89.357,49.098 89.153,48.895 86.08,48.895 85.775,49.2
  region net -5V: 89.357,49.454 85.775,49.504 82.809,46.482 74.092,46.482 71.095,49.479 64.744,49.479 62.128,46.863 56.825,46.863 54.209,49.479 47.269,49.479 44.272,46.482 39.599,46.482 37.008,49.073 35.103,49.073 34.747,48.717 34.747,47.319 37.845,44.221 45.847,44.221 48.717,47.091 52.654,47.091 55.397,44.348 63.652,44.348 66.268,46.964 70.409,46.964 73.152,44.221 84.13,44.221 86.467,46.558 87.864,46.558 89.357,48.051
  region net +5V: 22.275,47.65 25.577,47.65 28.6,50.673 36.957,50.673 39.954,47.676 43.433,47.676 46.431,50.673 54.203,50.673 57.2,47.676 61.264,47.676 64.261,50.673 71.221,50.673 74.218,47.676 76.886,47.676 77.089,47.879 77.089,48.971 73.127,52.933 62.839,52.933 59.969,50.063 58.344,50.063 55.448,52.959 45.211,52.959 42.443,50.19 40.64,50.19 37.897,52.933 27.279,52.933 23.469,49.124 22.631,49.124 22.275,48.767
  region net -5V: 81.229,20.345 91.821,20.345 92.38,19.787 92.38,18.059 91.77,17.45 82.296,17.45 81.229,18.517

## Silkscreen, mask and mechanical layers (free items; w line width, h text height)
Top Overlay:
  text "V+" at 76.302,54.178 h1.52
  text "V-" at 84.76,54.127 h1.52
  text "7805" at 22.225,43.744 h2
  text "+5V SWITCH" at 77.419,39.014 h2
  text "-5V SWITCH" at 77.546,27.229 h2
  text "VIN" at 3.404,17.501 h2 r90
  text "7905" at 22.225,13.467 h2
  text "V-" at 24.714,4.191 h1.52
  text "GND" at 28.067,4.191 h1.52
  text "V+" at 33.172,4.191 h1.52
  text "V-" at 41.859,4.191 h1.52
  text "GND" at 45.212,4.191 h1.52
  text "V+" at 50.317,4.191 h1.52
  text "V-" at 59.004,4.191 h1.52
  text "GND" at 62.357,4.191 h1.52
  text "V+" at 67.462,4.191 h1.52
  text "V-" at 76.149,4.191 h1.52
  text "GND" at 79.502,4.191 h1.52
  text "V+" at 84.607,4.191 h1.52
Bottom Solder:
  rectangle: 90.983,1.016 98.984,8.692
  region: 9.017,8.692 1.016,8.692 1.016,1.016 9.017,1.016
  region: 9.017,58.984 1.016,58.984 1.016,51.308 9.017,51.308
  rectangle: 90.983,51.308 98.984,58.984

## Text inside footprints (layer, text, board x,y; h text height)
D1: Top Overlay "+" at 64.332,31.777 h1.02 r90
D2: Top Overlay "+" at 64.332,17.172 h1.02 r90
P1: Top Overlay "GND" at 79.629,54.102 h1.52
P2: Top Overlay "V+" at 58.801,54.102 h1.52; Top Overlay "V-" at 67.691,54.102 h1.52; Top Overlay "GND" at 62.484,54.102 h1.52
P3: Top Overlay "V-" at 5.81,24.285 h1.52 r90; Top Overlay "V+" at 5.81,33.175 h1.52 r90; Top Overlay "GND" at 5.81,27.968 h1.52 r90
P4: Top Overlay "V+" at 41.656,54.102 h1.52; Top Overlay "V-" at 50.546,54.102 h1.52; Top Overlay "GND" at 45.339,54.102 h1.52
P5: Top Overlay "V+" at 24.511,54.102 h1.52; Top Overlay "V-" at 33.401,54.102 h1.52; Top Overlay "GND" at 28.194,54.102 h1.52